# EAGLE board nixie2 (EAGLE 6.5.0)
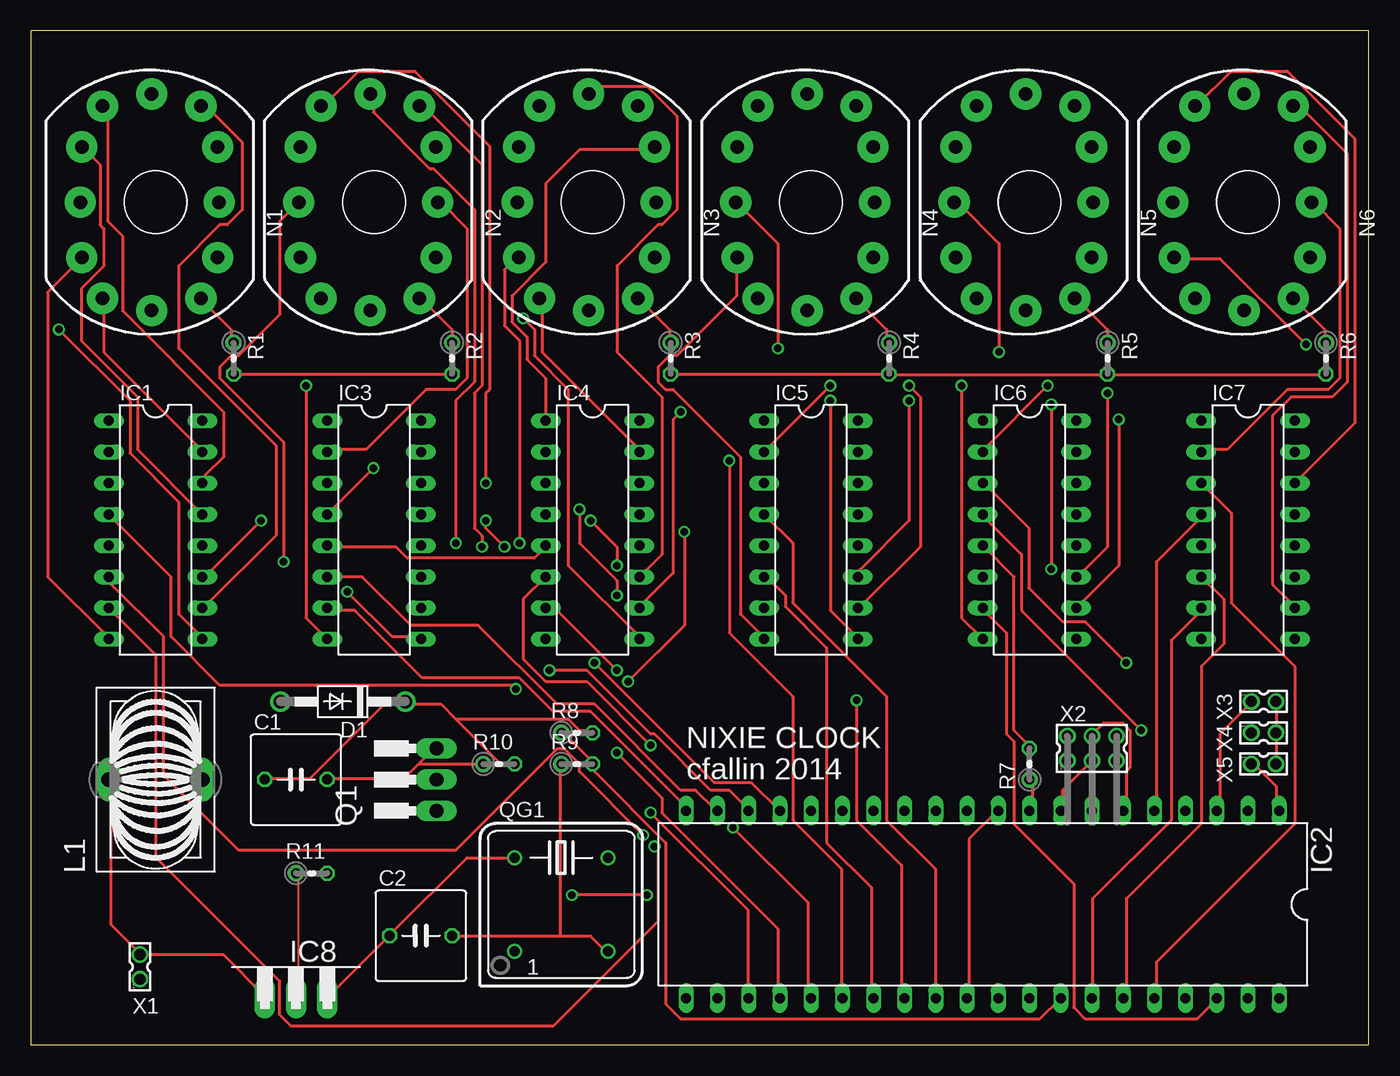
[diagram p0: board, top side]
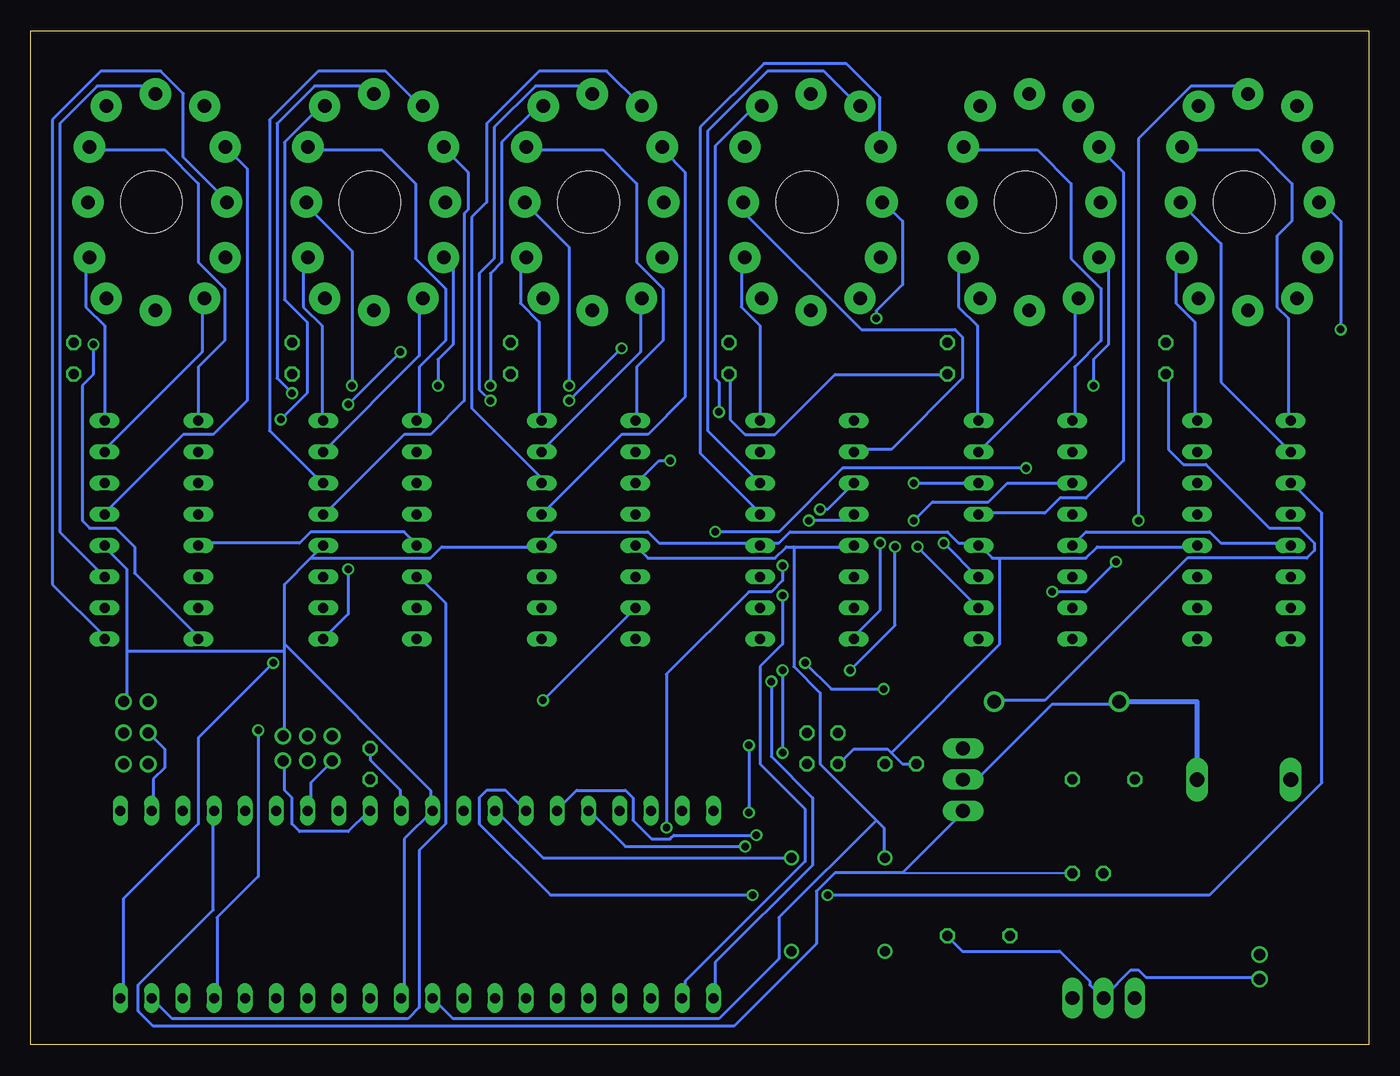
[diagram p1: board, bottom side, seen from below]

Size 108.89 x 82.54 mm. Coordinates in mm from the lower left corner, seen from the top.
Outline: 0,0 108.89,0 108.89,82.54 0,82.54 0,0
Copper layers (1*16): Top 0.0356mm / dielectric 1.5011mm / Bottom 0.0356mm
Design rules "LaenPCBOrder": minimum track width 6mil, minimum drill 13mil, track to track 6mil, track to pad 6mil, pad to pad 6mil, via to via 6mil, smd to smd 6mil, copper to edge 15mil, drill to drill 6mil, minimum pad ring 7mil, minimum via ring 7mil, stop-mask expansion 3mil, vias tented up to drill 0mil, thermal gap 10mil

## Footprints (pad centres in the part's own frame; a part is rotated, then mirrored left to right if it is on the bottom)
C050-075X075 = drill 0.813 octagon: 1 -2.54,0; 2 2.54,0
DO41-10 = drill 1.118: A 5.08,0; C -5.08,0
DIL16 = drill 0.813 long: 1 -8.89,-3.81; 2 -6.35,-3.81; 3 -3.81,-3.81; 4 -1.27,-3.81; 5 1.27,-3.81; 6 3.81,-3.81; 7 6.35,-3.81; 8 8.89,-3.81; 9 8.89,3.81; 10 6.35,3.81; 11 3.81,3.81; 12 1.27,3.81; 13 -1.27,3.81; 14 -3.81,3.81; 15 -6.35,3.81; 16 -8.89,3.81
DIL40 = drill 0.813 long: 1 -24.13,-7.62; 2 -21.59,-7.62; 3 -19.05,-7.62; 4 -16.51,-7.62; 5 -13.97,-7.62; 6 -11.43,-7.62; 7 -8.89,-7.62; 8 -6.35,-7.62; 9 -3.81,-7.62; 10 -1.27,-7.62; 11 1.27,-7.62; 12 3.81,-7.62; 13 6.35,-7.62; 14 8.89,-7.62; 15 11.43,-7.62; 16 13.97,-7.62; 17 16.51,-7.62; 18 19.05,-7.62; 19 21.59,-7.62; 20 24.13,-7.62; 21 24.13,7.62; 22 21.59,7.62; 23 19.05,7.62; 24 16.51,7.62; 25 13.97,7.62; 26 11.43,7.62; 27 8.89,7.62; 28 6.35,7.62; 29 3.81,7.62; 30 1.27,7.62; 31 -1.27,7.62; 32 -3.81,7.62; 33 -6.35,7.62; 34 -8.89,7.62; 35 -11.43,7.62; 36 -13.97,7.62; 37 -16.51,7.62; 38 -19.05,7.62; 39 -21.59,7.62; 40 -24.13,7.62
TO220H = drill 1.118 long: 1 -2.54,-10.16; 2 0,-10.16; 3 2.54,-10.16
A26GFC = drill 1.194 long: 1 0,3.81; 2 0,-3.81
IN-12 = drill 1.1 pad 2.54: 0 5.048,-4.5; 1 -4.317,-7.817; 2 -6,-4.5; 3 -6.127,0; 4 -6,4.5; 5 -4.317,7.817; 6 -0.318,8.818; 7 3.683,7.817; 8 5.048,4.5; 9 5.175,0; A 3.683,-7.817; LHDP -0.318,-8.818 | hole 5: 0,0
TO220 = drill 1.118 long: 1 -2.54,-6.35; 2 0,-6.35; 3 2.54,-6.35
DIL08S = drill 0.813: 1 -3.81,-3.81; 4 3.81,-3.81; 5 3.81,3.81; 8 -3.81,3.81
0204V = drill 0.813 octagon: 1 -1.27,0; 2 1.27,0
332-02 = drill 0.9 pad 1.27: 1 0,-1; 2 0,1
332-06 = drill 0.9 pad 1.27: 1 -2,-1; 2 -2,1; 3 0,-1; 4 0,1; 5 2,-1; 6 2,1

## Placement (x,y rotation side)
C1  22uF 250V  [C050-075X075]  21.59,21.59 0 top
C2  10uF 25V  [C050-075X075]  31.75,8.89 0 top
D1  1N4004  [DO41-10]  25.4,27.94 180 top
IC1  74141N  [DIL16]  10.16,41.91 270 top
IC2  MEGA16-P  [DIL40]  77.47,11.43 180 top
IC3  74141N  [DIL16]  27.94,41.91 270 top
IC4  74141N  [DIL16]  45.72,41.91 270 top
IC5  74141N  [DIL16]  63.5,41.91 270 top
IC6  74141N  [DIL16]  81.28,41.91 270 top
IC7  74141N  [DIL16]  99.06,41.91 270 top
IC8  7805T  [TO220H]  21.59,13.97 0 top
L1  A26GFC  [A26GFC]  10.16,21.59 90 top
N1  IN-12B  [IN-12]  10.16,68.58 0 top
N2  IN-12B  [IN-12]  27.94,68.58 0 top
N3  IN-12B  [IN-12]  45.72,68.58 0 top
N4  IN-12B  [IN-12]  63.5,68.58 0 top
N5  IN-12B  [IN-12]  81.28,68.58 0 top
N6  IN-12B  [IN-12]  99.06,68.58 0 top
Q1  IRF840  [TO220]  26.67,21.59 90 top
QG1  20MHz  [DIL08S]  43.18,11.43 0 top
R1  15k  [0204V]  16.51,55.88 270 top
R2  15k  [0204V]  34.29,55.88 270 top
R3  15k  [0204V]  52.07,55.88 270 top
R4  15k  [0204V]  69.85,55.88 270 top
R5  15k  [0204V]  87.63,55.88 270 top
R6  15k  [0204V]  105.41,55.88 270 top
R7  10K  [0204V]  81.28,22.86 90 top
R8  2.2M  [0204V]  44.45,25.4 0 top
R9  22k  [0204V]  44.45,22.86 0 top
R10  220k  [0204V]  38.1,22.86 0 top
R11  10k  [0204V]  22.86,13.97 0 top
X1  332-02  [332-02]  8.89,6.35 0 top
X2  332-06  [332-06]  86.36,24.13 0 top
X3  332-02  [332-02]  100.33,27.94 270 top
X4  332-02  [332-02]  100.33,25.4 270 top
X5  332-02  [332-02]  100.33,22.86 270 top

## Library data of the parts
C1 C2 R1-R11 = rcl
D1 = diode
IC1 IC3-IC7 = 74xx-us
IC2 = atmel; MPN: ATMEGA16-16PU; OC_FARNELL: 9171142; OC_NEWARK: 01M6885
IC8 = linear
L1 = inductors
N1-N6 = russian-nixies
Q1 = transistor-fet
QG1 = crystal; OC_FARNELL: unknown; OC_NEWARK: unknown
X1-X5 = con-garry

## Nets
GND: C1.2 C2.2 IC1.12 IC2.11 IC2.31 IC3.12 IC4.12 IC5.12 IC6.12 IC7.12 IC8.2 Q1.3 QG1.4 R9.1 R10.1 R11.1 X1.1 X2.6 X3.2 X4.2 X5.2
N$1: IC1.15 N1.1
N$2: IC1.8 N1.2
N$3: IC1.9 N1.3
N$4: IC1.13 N1.4
N$5: IC1.14 N1.5
N$6: IC1.11 N1.6
N$7: IC1.10 N1.7
N$8: IC1.1 N1.8
N$9: IC1.2 N1.9
N$11: N1.A R1.1
N$12: IC3.15 N2.1
N$13: IC3.8 N2.2
N$14: IC3.9 N2.3
N$15: IC3.13 N2.4
N$16: IC3.14 N2.5
N$17: IC3.11 N2.6
N$18: IC3.10 N2.7
N$19: IC3.1 N2.8
N$20: IC3.2 N2.9
N$21: IC3.16 N2.0
N$22: N2.A R2.1
N$23: IC4.15 N3.1
N$24: IC4.8 N3.2
N$25: IC4.9 N3.3
N$26: IC4.13 N3.4
N$27: IC4.14 N3.5
N$28: IC4.11 N3.6
N$29: IC4.10 N3.7
N$30: IC4.1 N3.8
N$31: IC4.2 N3.9
N$32: IC4.16 N3.0
N$33: N3.A R3.1
N$34: IC5.15 N4.1
N$35: IC5.8 N4.2
N$36: IC5.9 N4.3
N$37: IC5.13 N4.4
N$38: IC5.14 N4.5
N$39: IC5.11 N4.6
N$40: IC5.10 N4.7
N$41: IC5.1 N4.8
N$42: IC5.2 N4.9
N$43: IC5.16 N4.0
N$44: N4.A R4.1
N$45: IC6.15 N5.1
N$46: IC6.8 N5.2
N$47: IC6.9 N5.3
N$48: IC6.13 N5.4
N$49: IC6.14 N5.5
N$50: IC6.11 N5.6
N$51: IC6.10 N5.7
N$52: IC6.1 N5.8
N$53: IC6.2 N5.9
N$54: IC6.16 N5.0
N$55: N5.A R5.1
N$56: IC7.15 N6.1
N$57: IC7.8 N6.2
N$58: IC7.9 N6.3
N$59: IC7.13 N6.4
N$60: IC7.14 N6.5
N$61: IC7.11 N6.6
N$62: IC7.10 N6.7
N$63: IC7.1 N6.8
N$64: IC7.2 N6.9
N$65: IC7.16 N6.0
N$66: N6.A R6.1
N$67: C1.1 D1.C R1.2 R2.2 R3.2 R4.2 R5.2 R6.2 R8.2 R10.2
N$68: IC2.13 QG1.5
N$69: IC2.6 X2.4
N$70: D1.A L1.2 Q1.2
N$71: IC8.1 L1.1 X1.2
N$72: IC2.7 X2.1
N$73: IC2.8 X2.3
N$74: IC2.9 R7.1 X2.5
N$75: IC1.3 IC2.14
N$76: IC1.6 IC2.15
N$77: IC1.7 IC2.16
N$78: IC1.4 IC2.17
N$79: IC2.18 IC3.3
N$80: IC2.19 IC3.6
N$81: IC2.20 IC3.7
N$82: IC2.21 IC3.4
N$83: IC2.22 IC4.3
N$84: IC2.23 IC4.6
N$85: IC2.24 IC4.7
N$86: IC2.25 IC4.4
N$87: IC2.26 IC5.3
N$88: IC2.27 IC5.6
N$89: IC2.28 IC5.7
N$90: IC2.29 IC5.4
N$91: IC2.4 Q1.1 R11.2
N$92: IC2.40 IC6.3
N$93: IC2.39 IC6.6
N$94: IC2.38 IC6.7
N$95: IC2.37 IC6.4
N$96: IC2.36 IC7.3
N$97: IC2.35 IC7.6
N$98: IC2.34 IC7.7
N$99: IC2.5 IC7.4
N$100: IC2.33 R8.1 R9.2
N$101: IC2.3 X3.1
N$102: IC2.2 X4.1
N$103: IC2.1 X5.1
N$105: IC1.16 N1.0
VDD: C2.1 IC1.5 IC2.10 IC2.30 IC3.5 IC4.5 IC5.5 IC6.5 IC7.5 IC8.3 QG1.8 R7.2

## Tracks (layer width: path | path; a pad name or v marks a point on that pad's centre or on a via)
GND
  Top 0.152: 32.77,24.08 Q1.3 | R11.1 21.79,13.72 21.79,3.96 IC8.2
  Top 0.254: 32.77,24.08 31.55,22.86 | 31.55,22.86 30.33,21.64 24.23,21.64 C1.2 | 31.55,22.86 R10.1 | 43.13,8.84 45.57,8.84 46.79,7.62 QG1.4 | 43.13,8.84 34.29,8.84 C2.2 | 43.13,8.84 43.13,22.86 R9.1 | X5.2 101.35,22.86 101.35,25.3 X4.2 101.35,25.6 101.35,27.74 X3.2
  Bottom 0.152: 21.79,3.96 IC8.2 21.49,3.96
  Bottom 0.254: 30.02,39.62 30.63,39.62 31.55,40.54 IC3.12 31.85,40.84 33.38,40.84 34.29,41.76 47.09,41.76 48.01,40.84 49.53,40.84 | 30.02,39.62 23.01,39.62 22.1,40.54 14.17,40.54 IC1.12 | 21.49,3.96 19.36,6.1 18.75,6.1 18.14,5.49 8.99,5.49 X1.1 | 21.79,3.96 22.71,4.88 22.71,5.18 25.15,7.62 33.07,7.62 34.29,8.84 C2.2 | R10.1 37.95,22.86 38.86,23.77 | 38.86,23.77 39.17,24.08 41.91,24.08 43.13,22.86 R9.1 | 30.02,39.62 30.02,32.61 38.86,23.77 | 101.04,32 101.04,28.04 X3.2 | 101.04,32 101.04,38.71 102.87,40.54 IC7.12 | IC2.31 78.49,3.96 78.49,16.76 IC2.11 76.35,19.2 76.35,20.73 88.24,32.61 | 49.53,40.84 57.76,40.84 58.67,41.76 66.29,41.76 67.21,40.84 IC5.12 67.51,40.54 75.44,40.54 76.35,39.62 86.11,39.62 | 86.11,39.62 88.24,37.49 88.24,32.61 | 86.11,39.62 IC6.12 | 88.24,32 88.24,25.3 X2.6 | 88.24,32 88.24,32.61 | 88.24,32 101.04,32 | 49.53,40.84 IC4.12
N$1
  Top 0.254: IC1.15 13.87,48.46 5.94,56.39 5.94,60.66 N1.1
N$2
  Top 0.254: IC1.8 6.25,33.22 1.37,38.1 1.37,61.27 4.12,64.01 N1.2
N$3  (via drill 0.61)
  Top 0.254: v2.29,58.22 8.08,52.43 8.08,48.16 12.04,44.2 12.04,35.05 13.87,33.22 IC1.9
  Bottom 0.254: v2.29,58.22 2.29,67.06 3.81,68.58 N1.3
N$4
  Top 0.254: IC1.13 8.69,48.46 8.69,52.73 4.12,57.3 4.12,61.57 5.94,63.4 5.94,66.45 5.64,66.75 5.64,71.63 4.42,72.85 N1.4
N$5
  Top 0.254: IC1.14 14.17,45.72 14.17,46.33 15.7,47.85 15.7,51.51 7.47,59.74 7.47,65.84 6.25,67.06 6.25,75.89 5.94,76.2 N1.5
N$6  (via drill 0.61)
  Top 0.254: v18.75,42.67 14.17,38.1 IC1.11
  Bottom 0.254: v18.75,42.67 18.75,73.76 14.48,78.03 10.52,78.03 9.91,77.42 N1.6
N$7
  Top 0.254: IC1.10 14.17,35.66 19.96,41.45 19.96,48.77 12.04,56.69 12.04,63.4 15.39,66.75 16,66.75 17.22,67.97 17.22,73.46 14.48,76.2 13.87,76.2 N1.7
N$8
  Bottom 0.254: IC1.1 6.55,50.9 6.55,59.13 7.47,60.05 7.47,65.84 6.25,67.06 6.25,70.1 8.99,72.85 15.09,72.85 N1.8
N$9
  Bottom 0.254: IC1.2 12.04,53.95 12.04,65.23 15.39,68.58 N1.9
N$11
  Top 0.254: R1.1 16.31,57.3 16.31,58.22 13.87,60.66 N1.A
N$12
  Bottom 0.254: IC3.15 23.93,56.08 23.93,60.66 N2.1
N$13  (via drill 0.61)
  Top 0.254: IC3.8 22.4,34.75 v22.4,53.65
  Bottom 0.254: v22.4,53.65 22.4,55.78 21.18,57 21.18,63.4 21.79,64.01 N2.2
N$14  (via drill 0.61)
  Top 0.254: v25.76,36.88 29.41,33.22 31.55,33.22 IC3.9 | v20.57,39.32 20.57,49.07 15.39,54.25 15.39,55.17 16.31,56.08 16.92,56.08 20.27,59.44 20.27,67.06 21.79,68.58 N2.3
  Bottom 0.254: v25.76,36.88 23.01,36.88 v20.57,39.32
N$15
  Bottom 0.254: IC3.13 31.55,43.28 26.36,43.28 25.15,44.5 23.01,44.5 19.96,47.55 19.96,71.02 21.79,72.85 N2.4
N$16  (via drill 0.61)
  Top 0.254: v37.03,45.72 37.03,53.03 37.34,53.34 37.34,73.15 31.24,79.25 26.67,79.25 23.93,76.5 N2.5
  Bottom 0.254: v37.03,45.72 IC3.14
N$17  (via drill 0.61)
  Top 0.254: v34.59,40.84 34.59,52.43 36.12,53.95 36.12,67.97 32.77,71.32 32.46,71.32 27.89,75.89 27.89,77.11 N2.6
  Bottom 0.254: v34.59,40.84 31.85,38.1 IC3.11
N$18  (via drill 0.61)
  Top 0.254: v36.73,40.54 36.73,41.45 36.12,42.06 36.12,53.03 36.73,53.65 36.73,71.63 31.85,76.5 N2.7
  Bottom 0.254: v36.73,40.54 IC3.10
N$19
  Bottom 0.254: IC3.1 23.93,50.9 23.93,55.17 21.79,57.3 21.79,61.57 24.23,64.01 24.23,70.1 26.97,72.85 32.77,72.85 N2.8
N$20
  Top 0.254: IC3.2 24.23,48.46 27.28,48.46 32.16,53.34 34.59,53.34 35.51,54.25 35.51,66.45 33.38,68.58 N2.9
N$21
  Bottom 0.254: IC3.16 31.85,50.9 31.85,58.52 33.38,60.05 33.38,63.7 33.07,64.01 N2.0
N$22
  Top 0.254: R2.1 34.29,58.22 31.85,60.66 N2.A
N$23
  Top 0.254: IC4.15 49.53,48.46 41.61,56.39 41.61,60.66 N3.1
N$24  (via drill 0.61)
  Top 0.254: v39.78,40.84 39.78,57.3 38.56,58.52 38.56,63.09 39.47,64.01 N3.2
  Bottom 0.254: v39.78,40.84 39.78,35.36 41.91,33.22 IC4.8
N$25  (via drill 0.61)
  Top 0.254: v40.08,59.13 41,58.22 41,56.08 43.74,53.34 43.74,39.01 49.53,33.22 IC4.9
  Bottom 0.254: v40.08,59.13 40.08,59.74 37.95,61.87 37.95,67.06 39.47,68.58 N3.3
N$26
  Bottom 0.254: IC4.13 49.53,43.28 54.41,48.16 54.41,74.68 49.23,79.86 42.52,79.86 39.78,77.11 39.78,73.15 N3.4
N$27
  Bottom 0.254: IC4.14 53.8,49.99 53.8,74.37 48.92,79.25 44.35,79.25 41.61,76.5 N3.5
N$28
  Top 0.254: IC4.11 51.36,39.93 51.36,52.73 47.7,56.39 47.7,63.4 51.05,66.75 51.36,66.75 52.58,67.97 52.58,75.59 50.14,78.03 46.18,78.03 45.57,77.42 N3.6
N$29  (via drill 0.61)
  Top 0.254: v52.88,51.51 52.27,50.9 52.27,38.41 49.53,35.66 IC4.10
  Bottom 0.254: v52.88,51.51 52.88,53.95 53.19,54.25 53.19,73.15 50.14,76.2 49.53,76.2 N3.7
N$30
  Top 0.254: IC4.1 41.91,54.25 40.39,55.78 40.39,57.61 39.17,58.83 39.17,60.96 41.91,63.7 41.91,70.1 44.65,72.85 50.75,72.85 N3.8
N$31
  Bottom 0.254: IC4.2 41.91,48.46 38.86,48.46 33.07,54.25 33.07,57.61 33.68,58.22 41.3,58.22 50.75,67.67 50.75,68.58 N3.9
N$32
  Bottom 0.254: IC4.16 49.53,58.52 51.05,60.05 51.05,64.01 N3.0
N$33
  Top 0.254: R3.1 51.97,57.3 51.97,58.22 49.53,60.66 N3.A
N$34
  Bottom 0.254: IC5.15 67.21,48.46 59.28,56.39 59.28,60.66 N4.1
N$35
  Top 0.254: IC5.8 59.59,33.22 57.76,35.05 57.76,47.85 52.27,53.34 51.66,53.34 51.05,53.95 51.05,55.17 51.97,56.08 52.58,56.08 57.46,60.96 57.46,64.01 N4.2
N$36  (via drill 0.61)
  Top 0.254: v65.08,52.43 65.08,35.36 67.21,33.22 IC5.9 | v60.81,56.69 60.81,65.23 57.46,68.58 N4.3
  Bottom 0.254: v60.81,56.69 v65.08,52.43
N$37
  Bottom 0.254: IC5.13 60.81,49.68 58.67,49.68 55.63,52.73 55.63,71.02 57.46,72.85 N4.4
N$38
  Bottom 0.254: IC5.14 67.51,45.72 67.51,46.33 73,51.82 73,67.36 71.78,68.58 71.78,74.98 67.51,79.25 62.03,79.25 59.28,76.5 N4.5
N$39  (via drill 0.61)
  Top 0.254: v71.48,52.43 71.48,42.67 67.51,38.71 67.51,38.1 IC5.11
  Bottom 0.254: v71.48,52.43 72.39,53.34 72.39,62.79 71.17,64.01 71.17,74.68 67.82,78.03 63.86,78.03 63.25,77.42 N4.6
N$40  (via drill 0.61)
  Top 0.254: v71.48,53.65 72.39,52.73 72.39,40.54 67.51,35.66 IC5.10
  Bottom 0.254: v71.48,53.65 71.48,62.79 70.56,63.7 70.56,73.46 67.82,76.2 67.21,76.2 N4.7
N$41
  Bottom 0.254: IC5.1 59.59,50.9 59.59,55.17 57.46,57.3 57.46,61.57 59.59,63.7 59.59,70.1 62.33,72.85 68.43,72.85 N4.8
N$42  (via drill 0.61)
  Top 0.254: v65.08,53.65 IC5.2
  Bottom 0.254: v65.08,53.65 65.08,64.92 68.73,68.58 N4.9
N$43
  Bottom 0.254: IC5.16 67.51,50.9 67.51,58.83 69.04,60.35 69.04,63.7 68.73,64.01 N4.0
N$44
  Top 0.254: R4.1 69.65,57.3 69.65,58.22 67.21,60.66 N4.A
N$45
  Bottom 0.254: IC6.15 77.27,56.08 77.27,60.66 N5.1
N$46  (via drill 0.61)
  Top 0.254: IC6.8 75.74,34.75 v75.74,53.65
  Bottom 0.254: v75.74,53.65 75.74,55.78 74.52,57 74.52,63.4 75.13,64.01 N5.2
N$47  (via drill 0.61)
  Top 0.254: v83.06,52.12 v83.06,38.71 | v78.79,56.39 78.79,65.23 75.44,68.58 N5.3
  Bottom 0.254: IC6.9 83.06,35.05 v83.06,38.71 | v78.79,56.39 v83.06,52.12
N$48
  Bottom 0.254: IC6.13 84.89,43.28 78.49,49.68 76.35,49.68 73.61,52.43 73.61,67.67 73.3,67.97 73.3,71.02 75.13,72.85 N5.4
N$49
  Bottom 0.254: IC6.14 85.19,45.72 89.46,49.99 89.46,75.29 85.5,79.25 80.01,79.25 77.27,76.5 N5.5
N$50  (via drill 0.61)
  Top 0.254: v87.63,53.03 87.63,40.54 85.19,38.1 IC6.11
  Bottom 0.254: v87.63,53.03 88.85,54.25 88.85,74.98 85.8,78.03 81.84,78.03 81.23,77.42 N5.6
N$51  (via drill 0.61)
  Top 0.254: IC6.10 88.54,39.01 v88.54,50.9
  Bottom 0.254: v88.54,50.9 86.41,53.03 86.41,58.83 88.24,60.66 88.24,73.46 85.19,76.5 N5.7
N$52
  Bottom 0.254: IC6.1 77.27,50.9 77.27,55.17 75.13,57.3 75.13,61.57 77.57,64.01 77.57,70.1 80.31,72.85 86.11,72.85 N5.8
N$53  (via drill 0.61)
  Top 0.254: v82.75,53.65 77.57,48.46 IC6.2
  Bottom 0.254: v82.75,53.65 82.75,64.62 86.72,68.58 N5.9
N$54
  Bottom 0.254: IC6.16 85.19,50.9 85.19,58.52 86.72,60.05 86.72,63.7 86.41,64.01 N5.0
N$55
  Top 0.254: R5.1 87.63,58.22 85.19,60.66 N5.A
N$56
  Bottom 0.254: IC7.15 102.87,48.46 94.95,56.39 94.95,60.66 N6.1
N$57  (via drill 0.61)
  Top 0.254: v103.78,57 96.77,64.01 93.12,64.01 N6.2
  Bottom 0.254: v103.78,57 103.78,54.56 104.7,53.65 104.7,42.67 104.09,42.06 101.96,42.06 100.43,40.54 100.43,38.41 95.25,33.22 IC7.8
N$58
  Bottom 0.254: IC7.9 102.87,33.22 107.14,37.49 107.14,75.29 103.17,79.25 98.3,79.25 96.47,77.42 96.47,72.24 92.81,68.58 N6.3
N$59
  Bottom 0.254: IC7.13 102.87,43.28 96.47,49.68 94.03,49.68 91.29,52.43 91.29,71.32 92.81,72.85 N6.4
N$60
  Top 0.254: IC7.14 107.75,50.6 107.75,73.76 102.26,79.25 97.69,79.25 94.95,76.5 N6.5
N$61
  Bottom 0.254: IC7.11 106.53,41.76 106.53,74.98 103.48,78.03 99.52,78.03 98.91,77.42 N6.6
N$62
  Top 0.254: IC7.10 102.87,35.66 101.04,37.49 101.04,51.21 102.56,52.73 105.92,52.73 107.14,53.95 107.14,72.54 103.48,76.2 102.87,76.2 N6.7
N$63
  Bottom 0.254: IC7.1 95.25,55.17 93.12,57.3 93.12,61.57 95.25,63.7 95.25,70.1 97.99,72.85 104.09,72.85 N6.8
N$64
  Top 0.254: IC7.2 95.25,48.46 97.38,48.46 102.26,53.34 105.61,53.34 106.53,54.25 106.53,66.45 104.39,68.58 N6.9
N$65
  Bottom 0.254: IC7.16 102.87,58.52 104.39,60.05 104.39,64.01 N6.0
N$66
  Top 0.254: R6.1 105.31,57.3 105.31,58.22 102.87,60.66 N6.A
N$67
  Top 0.254: C1.1 19.05,21.64 22.71,21.64 28.8,27.74 30.33,27.74 D1.C 30.63,27.74 33.38,27.74 34.59,26.52 | R10.2 38.25,22.86 34.59,26.52 | 34.59,26.52 43.74,26.52 44.65,25.6 45.57,25.6 R8.2 | R1.2 16.61,54.56 34.29,54.56 R2.2 | R3.2 52.27,54.56 69.65,54.56 R4.2 69.95,54.56 87.63,54.56 | 87.63,54.56 105.31,54.56 R6.2 | 87.63,54.56 R5.2
  Bottom 0.254: R2.2 34.29,54.56 43.43,54.56 48.31,49.68 50.75,49.68 51.97,50.9 51.97,54.56 R3.2 | D1.C 30.33,28.04 26.36,28.04 14.78,39.62 5.03,39.62 4.42,40.23 4.42,40.84 5.64,42.06 8.08,42.06 13.26,47.24 15.09,47.24 16.31,48.46 16.31,54.56 R1.2
N$68
  Bottom 0.254: QG1.5 67.21,15.24 70.87,18.9 IC2.13
N$69
  Top 0.254: IC2.6 89.15,19.2 89.15,22.25 89.46,22.55 89.46,25.6 88.85,26.21 87.33,26.21 86.41,25.3 X2.4
N$70
  Bottom 0.152: 32.77,21.64 Q1.2
  Bottom 0.254: 32.77,21.64 31.85,21.64 25.76,27.74 20.57,27.74 D1.A
  Bottom 0.406: L1.2 13.97,27.94 D1.A
N$71
  Top 0.152: 19.05,3.96 IC8.1
  Top 0.254: 19.05,3.96 15.7,7.32 8.99,7.32 X1.2 8.69,7.62 6.55,9.75 6.55,21.34 L1.1
N$72
  Bottom 0.254: IC2.7 86.11,19.2 86.11,21.34 84.58,22.86 X2.1
N$73
  Top 0.254: IC2.8 83.97,19.2 83.97,20.73 86.11,22.86 X2.3
N$74
  Top 0.254: IC2.9 81.53,19.2 81.53,21.34 R7.1
  Bottom 0.254: X2.5 88.24,22.86 88.24,20.73 87.63,20.12 87.63,17.98 87.02,17.37 83.06,17.37 81.53,18.9 IC2.9
N$75  (via drill 0.61)
  Top 0.254: v50.14,12.19 v44.04,12.19
  Bottom 0.254: v44.04,12.19 12.95,12.19 3.81,21.34 3.81,43.28 6.25,45.72 IC1.3 | v50.14,12.19 66.6,12.19 72.39,17.98 72.39,20.12 71.78,20.73 70.26,20.73 IC2.14
N$76  (via drill 0.61)
  Top 0.254: v49.84,17.07 44.65,22.25 44.65,22.86 43.43,24.08 42.82,24.08 34.59,15.85 16.92,15.85 10.82,21.95 10.82,33.22 6.55,37.49 6.55,38.1 IC1.6
  Bottom 0.254: v49.84,17.07 56.54,17.07 56.84,16.76 58.37,16.76 59.89,18.29 59.89,20.12 60.5,20.73 64.47,20.73 65.99,19.2 IC2.15
N$77  (via drill 0.61)
  Top 0.254: IC1.7 10.21,31.7 10.21,15.24 20.27,5.18 20.27,2.44 21.18,1.52 42.52,1.52 51.05,10.06 51.05,15.85 v50.75,16.15
  Bottom 0.254: v50.75,16.15 60.5,16.15 63.25,18.9 IC2.16
N$78  (via drill 0.61)
  Top 0.254: IC1.4 11.43,38.1 11.43,33.22 15.39,29.26 39.17,29.26 v39.47,28.96 | v45.87,31.09 55.63,21.34 58.67,21.34 IC2.17
  Bottom 0.254: v39.47,28.96 43.74,28.96 v45.87,31.09
N$79  (via drill 0.61)
  Top 0.254: v37.03,42.67 37.03,42.06 v38.56,40.54 | v42.22,30.48 45.26,30.48 50.44,25.3 50.75,25.3 55.32,20.73 56.84,20.73 58.37,19.2 IC2.18
  Bottom 0.254: IC3.3 29.41,45.72 30.94,44.2 35.51,44.2 v37.03,42.67 | v38.56,40.54 38.56,34.14 v42.22,30.48
N$80
  Top 0.254: IC3.6 26.97,38.1 30.94,34.14 36.42,34.14 42.82,27.74 45.87,27.74 52.88,20.73 54.1,20.73 55.63,19.2 IC2.19
N$81
  Top 0.254: IC3.7 24.23,35.36 26.36,35.36 31.85,29.87 39.78,29.87 42.52,27.13 45.57,27.13 53.49,19.2 IC2.20
N$82  (via drill 0.61)
  Top 0.254: v48.62,29.57 53.19,34.14 v53.19,41.76 | IC3.4 v27.89,46.94
  Bottom 0.254: v48.62,29.57 48.62,23.47 45.26,20.12 45.26,14.63 53.19,6.71 53.19,3.96 IC2.21 | v53.19,41.76 48.01,41.76 42.82,46.94 v27.89,46.94
N$83  (via drill 0.61)
  Top 0.254: v47.7,36.58 47.7,37.8 44.65,40.84 v44.65,43.59
  Bottom 0.254: v47.7,36.58 47.7,32.61 49.53,30.79 49.53,22.86 45.87,19.2 45.87,14.94 55.63,5.18 55.63,3.96 IC2.22 | v44.65,43.59 44.04,43.59 IC4.3
N$84  (via drill 0.61)
  Top 0.254: v50.44,18.9 58.37,10.97 58.37,3.96 IC2.23 | v50.44,24.38 45.26,29.57 41.91,29.57 40.08,31.39 40.08,36.27 IC4.6
  Bottom 0.254: v50.44,24.38 v50.44,18.9
N$85  (via drill 0.61)
  Top 0.254: v47.7,23.77 51.36,20.12 51.36,18.9 60.81,9.45 60.81,3.96 IC2.24 | v47.7,30.48 42.82,35.36 41.91,35.36 IC4.7
  Bottom 0.254: v47.7,30.48 v47.7,23.77
N$86  (via drill 0.61)
  Top 0.254: v57.15,17.68 63.25,11.58 63.25,3.96 IC2.25 | v47.7,39.01 47.7,40.54 v45.57,42.67
  Bottom 0.254: v57.15,17.68 57.15,30.18 50.44,36.88 48.62,36.88 47.7,37.8 v47.7,39.01 | v45.57,42.67 42.22,42.67 41.91,42.98 IC4.4
N$87  (via drill 0.61)
  Top 0.254: v56.84,47.55 56.84,33.53 62.03,28.35 62.03,18.29 65.99,14.33 65.99,3.96 IC2.26
  Bottom 0.254: v56.84,47.55 57.76,47.55 59.59,45.72 IC5.3
N$88
  Top 0.254: IC2.27 68.43,3.96 68.43,12.8 64.77,16.46 64.77,32.31 61.42,35.66 61.42,36.58 59.89,38.1 IC5.6
N$89  (via drill 0.61)
  Top 0.254: v67.21,28.04 67.21,18.29 70.87,14.63 70.87,3.96 IC2.28
  Bottom 0.254: IC5.7 v67.21,28.04
N$90
  Top 0.254: IC5.4 62.03,40.84 62.03,35.97 69.65,28.35 69.65,18.29 73.61,14.33 73.61,3.96 IC2.29
N$91
  Bottom 0.152: 37.95,14.02 24.23,14.02 R11.2 | 33.07,18.9 Q1.1
  Bottom 0.254: 33.07,18.9 37.95,14.02 43.43,14.02 44.96,12.5 44.96,8.23 51.66,1.52 98.91,1.52 100.13,2.74 100.13,4.88 94.03,10.97 94.03,18.9 IC2.4
N$92  (via drill 0.61)
  Top 0.254: v89.15,31.09 85.8,34.44 83.97,34.44 81.23,37.19 81.23,42.06 77.57,45.72 IC6.3
  Bottom 0.254: v89.15,31.09 95.25,24.99 95.25,17.98 101.35,11.89 101.35,3.96 IC2.40
N$93
  Bottom 0.254: IC2.39 97.38,2.13 78.18,2.13 77.27,3.05 77.27,15.85 75.13,17.98 75.13,35.97 77.27,38.1 IC6.6
N$94
  Top 0.254: IC2.38 96.47,3.66 94.95,2.13 85.8,2.13 84.89,3.05 84.89,13.11 80.01,17.98 80.01,24.69 79.4,25.3 79.4,33.53 77.57,35.36 IC6.7
N$95  (via drill 0.61)
  Top 0.254: v90.37,25.6 80.62,35.36 80.62,39.93 77.57,42.98 IC6.4
  Bottom 0.254: v90.37,25.6 90.37,13.72 93.73,10.36 93.73,3.96 IC2.37
N$96
  Top 0.254: IC7.3 97.69,43.28 97.69,35.97 102.87,30.79 102.87,17.98 91.59,6.71 91.59,3.96 IC2.36
N$97
  Top 0.254: IC7.6 97.08,36.27 97.08,32.61 95.25,30.79 95.25,17.98 89.15,11.89 89.15,3.96 IC2.35
N$98
  Top 0.254: IC2.34 86.41,3.96 86.41,11.89 92.81,18.29 92.81,32.92 95.25,35.36 IC7.7
N$99
  Top 0.254: IC2.5 91.59,19.2 91.59,39.32 95.25,42.98 IC7.4
N$100
  Top 0.254: 45.87,22.86 43.43,25.3 R8.1 | IC2.33 82.14,2.13 52.88,2.13 51.66,3.35 51.66,16.46 45.87,22.25 45.87,22.86 | 45.87,22.86 R9.2
N$101
  Top 0.254: IC2.3 96.77,19.2 96.77,25.3 99.21,27.74 X3.1
N$102
  Bottom 0.254: IC2.2 98.91,19.2 98.91,21.64 97.99,22.55 97.99,24.08 99.21,25.3 X4.1
N$103
  Top 0.254: IC2.1 101.35,19.2 101.35,21.03 99.52,22.86 X5.1
N$105
  Bottom 0.254: IC1.16 14.17,50.9 14.17,58.83 15.7,60.35 15.7,63.7 15.39,64.01 N1.0
VDD
  Top 0.152: 24.23,3.96 IC8.3
  Top 0.254: IC2.30 76.35,3.96 76.35,16.76 78.49,18.9 IC2.10 | IC6.5 80.01,38.1 80.01,25.6 81.23,24.38 R7.2 | 24.23,3.96 29.11,8.84 C2.1 29.41,9.14 35.51,15.24 QG1.8 | IC3.5 24.23,40.54 29.72,40.54 30.63,39.62 41,39.62 41.91,40.54 IC4.5
  Bottom 0.254: R7.2 81.23,24.08 81.23,23.16 78.79,20.73 78.79,19.2 IC2.10 | IC7.5 95.25,40.84 87.02,40.84 86.11,41.76 78.49,41.76 77.57,40.84 IC6.5 | IC3.5 23.01,41.76 12.95,41.76 12.04,40.84 6.55,40.84 IC1.5 | 46.79,40.54 47.4,40.54 48.31,39.62 58.67,39.62 IC5.5 | 46.79,40.54 41.91,40.54 IC4.5 | 40.08,18.29 44.65,22.86 44.65,28.65 46.79,30.79 46.79,40.54 | 40.08,18.29 39.47,17.68 39.47,15.24 QG1.8 | IC2.30 74.52,2.13 52.88,2.13 48.01,7.01 48.01,10.36 40.08,18.29

## Text on the board
tNames: NIXIE CLOCK | cfallin 2014